# EAGLE board 16ch_hiroseadapter (EAGLE 7.2.0)
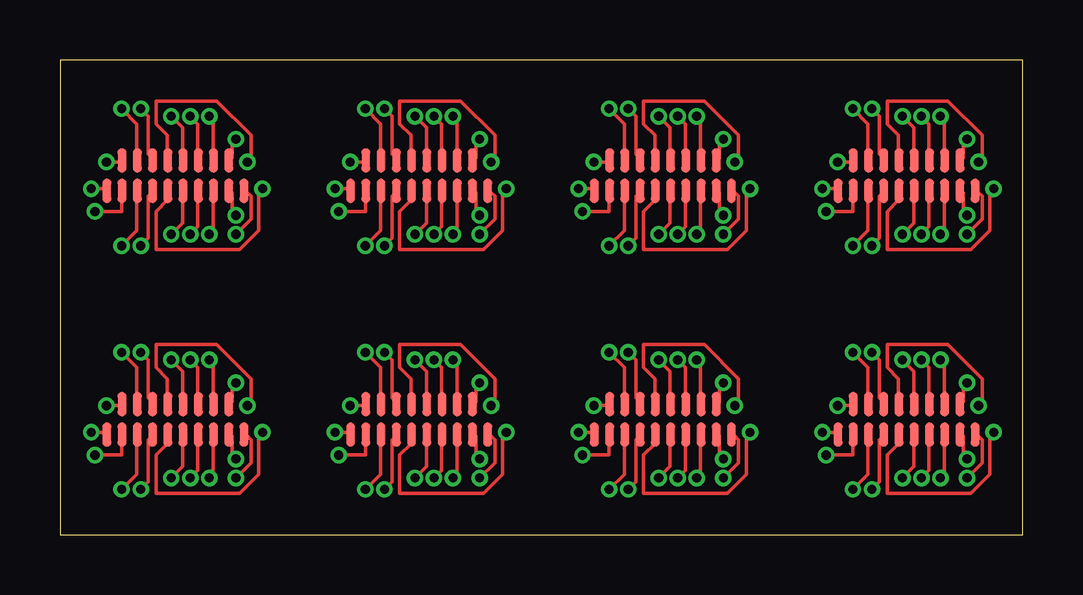
[diagram p0: board, top side]
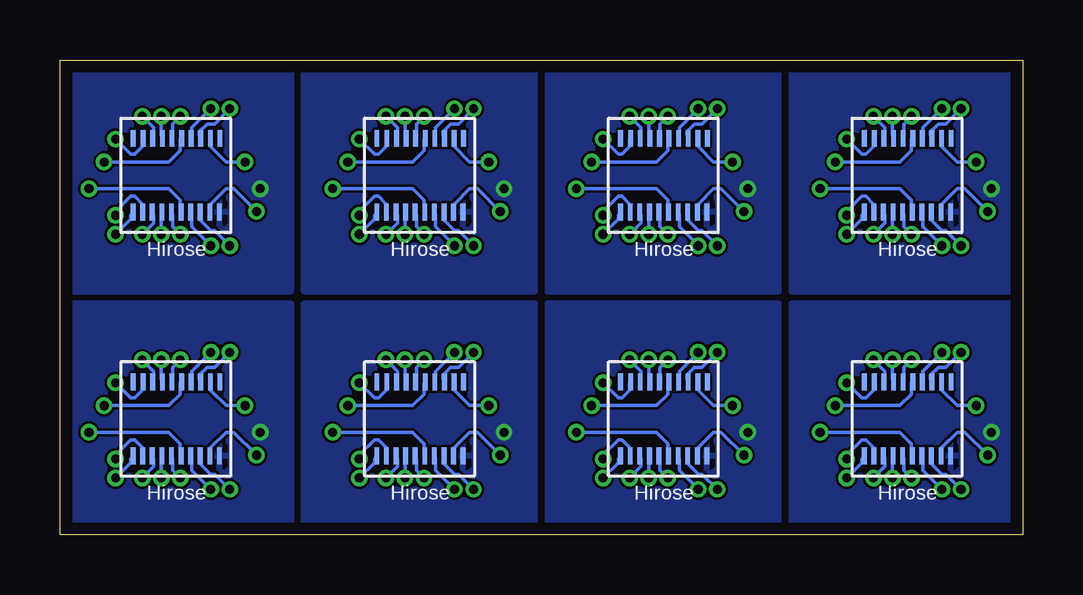
[diagram p1: board, bottom side, seen from below]

Size 40.13 x 19.81 mm. Coordinates in mm from the lower left corner, seen from the top.
Outline: 10.16,0 19.81,0
Outline: 20.32,0 29.97,0
Outline: 0,0 9.65,0 30.48,0 40.13,0 40.13,19.81 0,19.81 0,0
Copper layers (1*16): Top 0.035mm / dielectric 1.5mm / Bottom 0.035mm
Design rules "default *": minimum track width 6mil, minimum drill 15mil, track to track 4mil, track to pad 4mil, pad to pad 4mil, via to via 4mil, smd to smd 4mil, copper to edge 20mil, drill to drill 6mil, minimum pad ring 8mil, minimum via ring 6mil, stop-mask expansion 4mil, vias tented up to drill 0mil, thermal gap 10mil

## Footprints (pad centres in the part's own frame; a part is rotated, then mirrored left to right if it is on the bottom)
HIROSE_DF40C-70DS = smd 0.2 x 0.7: P$1 0,0; P$2 -0.4,0; P$3 -0.8,0; P$4 -1.2,0; P$5 -1.6,0; P$6 -2,0; P$7 -2.4,0; P$8 -2.8,0; P$9 -3.2,0; P$10 -3.6,0; P$36 0,-3.08; P$37 -0.42,-3.08; P$38 -0.82,-3.08; P$39 -1.22,-3.08; P$40 -1.62,-3.08; P$41 -2.02,-3.08; P$42 -2.42,-3.08; P$43 -2.82,-3.08; P$44 -3.22,-3.08; P$45 -3.62,-3.08
OMNETICS_FE18 = smd 0.381 x 1.016: P$1 -1.905,0.635; P$2 -1.27,0.635; P$3 -0.635,0.635; P$4 0,0.635; P$5 0.635,0.635; P$6 1.27,0.635; P$7 1.905,0.635; P$8 2.54,0.635; P$9 2.54,-0.635; P$10 1.905,-0.635; P$11 1.27,-0.635; P$12 0.635,-0.635; P$13 0,-0.635; P$14 -0.635,-0.635; P$15 -1.27,-0.635; P$16 -1.905,-0.635; P$17 -2.54,0.635; P$18 3.175,0.635

## Placement (x,y rotation side)
U$1  HIROSE_DF40_70PIN  [HIROSE_DF40C-70DS]  6.6,13.46 180 bottom
U$2  OMNETICS_FE18  [OMNETICS_FE18]  5.13,14.99 180 top
U$3  HIROSE_DF40_70PIN  [HIROSE_DF40C-70DS]  6.6,3.3 180 bottom
U$4  OMNETICS_FE18  [OMNETICS_FE18]  5.13,4.83 180 top
U$5  HIROSE_DF40_70PIN  [HIROSE_DF40C-70DS]  16.76,13.46 180 bottom
U$6  OMNETICS_FE18  [OMNETICS_FE18]  15.29,14.99 180 top
U$7  HIROSE_DF40_70PIN  [HIROSE_DF40C-70DS]  16.76,3.3 180 bottom
U$8  OMNETICS_FE18  [OMNETICS_FE18]  15.29,4.83 180 top
U$9  HIROSE_DF40_70PIN  [HIROSE_DF40C-70DS]  26.92,13.46 180 bottom
U$10  OMNETICS_FE18  [OMNETICS_FE18]  25.45,14.99 180 top
U$11  HIROSE_DF40_70PIN  [HIROSE_DF40C-70DS]  26.92,3.3 180 bottom
U$12  OMNETICS_FE18  [OMNETICS_FE18]  25.45,4.83 180 top
U$13  HIROSE_DF40_70PIN  [HIROSE_DF40C-70DS]  37.08,13.46 180 bottom
U$14  OMNETICS_FE18  [OMNETICS_FE18]  35.61,14.99 180 top
U$15  HIROSE_DF40_70PIN  [HIROSE_DF40C-70DS]  37.08,3.3 180 bottom
U$16  OMNETICS_FE18  [OMNETICS_FE18]  35.61,4.83 180 top

## Library data of the parts
U$1 U$3 U$5 U$7 U$9 U$11 U$13 U$15 = GG_hirose20
U$2 U$4 U$6 U$8 U$10 U$12 U$14 U$16 = connectors

## Nets
N$1: U$1.P$10 U$2.P$18
N$2: U$1.P$9 U$2.P$8
N$3: U$1.P$8 U$2.P$7
N$4: U$1.P$7 U$2.P$6
N$5: U$1.P$6 U$2.P$5
N$6: U$1.P$5 U$2.P$4
N$7: U$1.P$4 U$2.P$3
N$8: U$1.P$3 U$2.P$2
N$9: U$1.P$2 U$2.P$1
N$10: U$1.P$1 U$2.P$17
N$11: U$1.P$44 U$2.P$9
N$12: U$1.P$43 U$2.P$10
N$13: U$1.P$42 U$2.P$11
N$14: U$1.P$41 U$2.P$12
N$15: U$1.P$40 U$2.P$13
N$16: U$1.P$39 U$2.P$14
N$17: U$1.P$38 U$2.P$15
N$18: U$1.P$37 U$2.P$16
N$19: U$3.P$10 U$4.P$18
N$20: U$3.P$9 U$4.P$8
N$21: U$3.P$8 U$4.P$7
N$22: U$3.P$7 U$4.P$6
N$23: U$3.P$6 U$4.P$5
N$24: U$3.P$5 U$4.P$4
N$25: U$3.P$4 U$4.P$3
N$26: U$3.P$3 U$4.P$2
N$27: U$3.P$2 U$4.P$1
N$28: U$3.P$1 U$4.P$17
N$29: U$3.P$44 U$4.P$9
N$30: U$3.P$43 U$4.P$10
N$31: U$3.P$42 U$4.P$11
N$32: U$3.P$41 U$4.P$12
N$33: U$3.P$40 U$4.P$13
N$34: U$3.P$39 U$4.P$14
N$35: U$3.P$38 U$4.P$15
N$36: U$3.P$37 U$4.P$16
N$37: U$5.P$10 U$6.P$18
N$38: U$5.P$9 U$6.P$8
N$39: U$5.P$8 U$6.P$7
N$40: U$5.P$7 U$6.P$6
N$41: U$5.P$6 U$6.P$5
N$42: U$5.P$5 U$6.P$4
N$43: U$5.P$4 U$6.P$3
N$44: U$5.P$3 U$6.P$2
N$45: U$5.P$2 U$6.P$1
N$46: U$5.P$1 U$6.P$17
N$47: U$5.P$44 U$6.P$9
N$48: U$5.P$43 U$6.P$10
N$49: U$5.P$42 U$6.P$11
N$50: U$5.P$41 U$6.P$12
N$51: U$5.P$40 U$6.P$13
N$52: U$5.P$39 U$6.P$14
N$53: U$5.P$38 U$6.P$15
N$54: U$5.P$37 U$6.P$16
N$55: U$7.P$10 U$8.P$18
N$56: U$7.P$9 U$8.P$8
N$57: U$7.P$8 U$8.P$7
N$58: U$7.P$7 U$8.P$6
N$59: U$7.P$6 U$8.P$5
N$60: U$7.P$5 U$8.P$4
N$61: U$7.P$4 U$8.P$3
N$62: U$7.P$3 U$8.P$2
N$63: U$7.P$2 U$8.P$1
N$64: U$7.P$1 U$8.P$17
N$65: U$7.P$44 U$8.P$9
N$66: U$7.P$43 U$8.P$10
N$67: U$7.P$42 U$8.P$11
N$68: U$7.P$41 U$8.P$12
N$69: U$7.P$40 U$8.P$13
N$70: U$7.P$39 U$8.P$14
N$71: U$7.P$38 U$8.P$15
N$72: U$7.P$37 U$8.P$16
N$73: U$9.P$10 U$10.P$18
N$74: U$9.P$9 U$10.P$8
N$75: U$9.P$8 U$10.P$7
N$76: U$9.P$7 U$10.P$6
N$77: U$9.P$6 U$10.P$5
N$78: U$9.P$5 U$10.P$4
N$79: U$9.P$4 U$10.P$3
N$80: U$9.P$3 U$10.P$2
N$81: U$9.P$2 U$10.P$1
N$82: U$9.P$1 U$10.P$17
N$83: U$9.P$44 U$10.P$9
N$84: U$9.P$43 U$10.P$10
N$85: U$9.P$42 U$10.P$11
N$86: U$9.P$41 U$10.P$12
N$87: U$9.P$40 U$10.P$13
N$88: U$9.P$39 U$10.P$14
N$89: U$9.P$38 U$10.P$15
N$90: U$9.P$37 U$10.P$16
N$91: U$11.P$10 U$12.P$18
N$92: U$11.P$9 U$12.P$8
N$93: U$11.P$8 U$12.P$7
N$94: U$11.P$7 U$12.P$6
N$95: U$11.P$6 U$12.P$5
N$96: U$11.P$5 U$12.P$4
N$97: U$11.P$4 U$12.P$3
N$98: U$11.P$3 U$12.P$2
N$99: U$11.P$2 U$12.P$1
N$100: U$11.P$1 U$12.P$17
N$101: U$11.P$44 U$12.P$9
N$102: U$11.P$43 U$12.P$10
N$103: U$11.P$42 U$12.P$11
N$104: U$11.P$41 U$12.P$12
N$105: U$11.P$40 U$12.P$13
N$106: U$11.P$39 U$12.P$14
N$107: U$11.P$38 U$12.P$15
N$108: U$11.P$37 U$12.P$16
N$109: U$13.P$10 U$14.P$18
N$110: U$13.P$9 U$14.P$8
N$111: U$13.P$8 U$14.P$7
N$112: U$13.P$7 U$14.P$6
N$113: U$13.P$6 U$14.P$5
N$114: U$13.P$5 U$14.P$4
N$115: U$13.P$4 U$14.P$3
N$116: U$13.P$3 U$14.P$2
N$117: U$13.P$2 U$14.P$1
N$118: U$13.P$1 U$14.P$17
N$119: U$13.P$44 U$14.P$9
N$120: U$13.P$43 U$14.P$10
N$121: U$13.P$42 U$14.P$11
N$122: U$13.P$41 U$14.P$12
N$123: U$13.P$40 U$14.P$13
N$124: U$13.P$39 U$14.P$14
N$125: U$13.P$38 U$14.P$15
N$126: U$13.P$37 U$14.P$16
N$127: U$15.P$10 U$16.P$18
N$128: U$15.P$9 U$16.P$8
N$129: U$15.P$8 U$16.P$7
N$130: U$15.P$7 U$16.P$6
N$131: U$15.P$6 U$16.P$5
N$132: U$15.P$5 U$16.P$4
N$133: U$15.P$4 U$16.P$3
N$134: U$15.P$3 U$16.P$2
N$135: U$15.P$2 U$16.P$1
N$136: U$15.P$1 U$16.P$17
N$137: U$15.P$44 U$16.P$9
N$138: U$15.P$43 U$16.P$10
N$139: U$15.P$42 U$16.P$11
N$140: U$15.P$41 U$16.P$12
N$141: U$15.P$40 U$16.P$13
N$142: U$15.P$39 U$16.P$14
N$143: U$15.P$38 U$16.P$15
N$144: U$15.P$37 U$16.P$16

## Tracks (layer width: path | path; a pad name or v marks a point on that pad's centre or on a via)
N$1  (via drill 0.38)
  Top 0.152: v1.3,14.45 1.94,14.45 U$2.P$18
  pour Bottom: 0,19.81 9.65,19.81 9.65,10.16 0,10.16
N$2  (via drill 0.38)
  Top 0.152: v1.46,13.49 2.57,13.49 2.57,14.29 U$2.P$8
  Bottom 0.152: v1.46,13.49 2.41,14.45 2.73,14.45 3.37,13.81 3.37,13.49 U$1.P$9
N$3  (via drill 0.38)
  Top 0.152: v2.57,12.06 3.21,12.7 3.21,14.29 U$2.P$7
  Bottom 0.152: v2.57,12.06 3.21,12.7 3.37,12.7 3.84,13.18 3.84,13.34 U$1.P$8
N$4  (via drill 0.38)
  Top 0.152: v3.37,12.06 3.68,12.38 3.68,14.13 3.84,14.29 U$2.P$6
  Bottom 0.152: v3.37,12.06 4.16,12.86 4.16,13.34 U$1.P$7
N$5  (via drill 0.38)
  Top 0.152: v8.45,14.45 8.29,14.29 8.29,12.7 7.49,11.91 4,11.91 4,13.49 4.48,13.97 4.48,14.29 U$2.P$5
  Bottom 0.152: v8.45,14.45 5.11,14.45 4.64,13.97 4.64,13.49 U$1.P$6
N$6  (via drill 0.38)
  Top 0.152: v4.64,12.54 5.11,13.02 5.11,14.29 U$2.P$4
  Bottom 0.152: v4.64,12.54 4.95,12.86 4.95,13.34 U$1.P$5
N$7  (via drill 0.38)
  Top 0.152: v5.43,12.54 5.75,12.86 5.75,14.29 U$2.P$3
  Bottom 0.152: v5.43,12.54 5.43,13.34 U$1.P$4
N$8  (via drill 0.38)
  Top 0.152: v6.22,12.54 6.38,12.7 6.38,14.29 U$2.P$2
  Bottom 0.152: v6.22,12.54 5.75,13.02 5.75,13.34 U$1.P$3
N$9  (via drill 0.38)
  Top 0.152: v7.33,13.34 7.18,13.49 7.18,14.29 U$2.P$1
  Bottom 0.152: v7.33,13.34 7.33,13.49 6.7,14.13 6.54,14.13 6.22,13.81 6.22,13.49 U$1.P$2
N$10  (via drill 0.38)
  Top 0.152: v7.33,12.54 7.97,13.18 7.97,14.13 7.81,14.29 U$2.P$17
  Bottom 0.152: v7.33,12.54 6.7,13.18 6.7,13.34 U$1.P$1
N$11  (via drill 0.38)
  Top 0.152: v1.94,15.56 2.57,15.56 U$2.P$9
  Bottom 0.152: v1.94,15.56 2.73,15.56 3.37,16.19 3.37,16.51 U$1.P$44
N$12  (via drill 0.38)
  Top 0.152: v2.57,17.78 3.21,17.15 3.21,15.72 U$2.P$10
  Bottom 0.152: v2.57,17.78 3.21,17.15 3.52,17.15 3.84,16.83 3.84,16.67 U$1.P$43
N$13  (via drill 0.38)
  Top 0.152: v3.37,17.78 3.68,17.46 3.68,15.88 3.84,15.72 U$2.P$11
  Bottom 0.152: v3.37,17.78 4.16,16.99 4.16,16.67 U$1.P$42
N$14  (via drill 0.38)
  Top 0.152: v7.81,15.56 7.97,15.72 7.97,16.67 6.54,18.1 4,18.1 4,17.15 4.48,16.67 4.48,15.72 U$2.P$12
  Bottom 0.152: v7.81,15.56 5.11,15.56 4.64,16.03 4.64,16.51 U$1.P$41
N$15  (via drill 0.38)
  Top 0.152: v4.64,17.46 5.11,16.99 5.11,15.72 U$2.P$13
  Bottom 0.152: v4.64,17.46 4.95,17.15 4.95,16.67 U$1.P$40
N$16  (via drill 0.38)
  Top 0.152: v5.43,17.46 5.75,17.15 5.75,15.72 U$2.P$14
  Bottom 0.152: v5.43,17.46 5.43,16.67 U$1.P$39
N$17  (via drill 0.38)
  Top 0.152: v6.22,17.46 6.38,17.3 6.38,15.72 U$2.P$15
  Bottom 0.152: v6.22,17.46 5.75,16.99 5.75,16.67 U$1.P$38
N$18  (via drill 0.38)
  Top 0.152: v7.33,16.51 7.18,16.35 7.18,15.72 U$2.P$16
  Bottom 0.152: v7.33,16.51 6.7,15.88 6.54,15.88 6.22,16.19 6.22,16.51 U$1.P$37
N$19  (via drill 0.38)
  Top 0.152: v1.3,4.29 1.94,4.29 U$4.P$18
  pour Bottom: 0,9.65 9.65,9.65 9.65,0 0,0
N$20  (via drill 0.38)
  Top 0.152: v1.46,3.33 2.57,3.33 2.57,4.13 U$4.P$8
  Bottom 0.152: v1.46,3.33 2.41,4.29 2.73,4.29 3.37,3.65 3.37,3.33 U$3.P$9
N$21  (via drill 0.38)
  Top 0.152: v2.57,1.91 3.21,2.54 3.21,4.13 U$4.P$7
  Bottom 0.152: v2.57,1.91 3.21,2.54 3.37,2.54 3.84,3.02 3.84,3.18 U$3.P$8
N$22  (via drill 0.38)
  Top 0.152: v3.37,1.91 3.68,2.22 3.68,3.97 3.84,4.13 U$4.P$6
  Bottom 0.152: v3.37,1.91 4.16,2.7 4.16,3.18 U$3.P$7
N$23  (via drill 0.38)
  Top 0.152: v8.45,4.29 8.29,4.13 8.29,2.54 7.49,1.75 4,1.75 4,3.33 4.48,3.81 4.48,4.13 U$4.P$5
  Bottom 0.152: v8.45,4.29 5.11,4.29 4.64,3.81 4.64,3.33 U$3.P$6
N$24  (via drill 0.38)
  Top 0.152: v4.64,2.38 5.11,2.86 5.11,4.13 U$4.P$4
  Bottom 0.152: v4.64,2.38 4.95,2.7 4.95,3.18 U$3.P$5
N$25  (via drill 0.38)
  Top 0.152: v5.43,2.38 5.75,2.7 5.75,4.13 U$4.P$3
  Bottom 0.152: v5.43,2.38 5.43,3.18 U$3.P$4
N$26  (via drill 0.38)
  Top 0.152: v6.22,2.38 6.38,2.54 6.38,4.13 U$4.P$2
  Bottom 0.152: v6.22,2.38 5.75,2.86 5.75,3.18 U$3.P$3
N$27  (via drill 0.38)
  Top 0.152: v7.33,3.18 7.18,3.33 7.18,4.13 U$4.P$1
  Bottom 0.152: v7.33,3.18 7.33,3.33 6.7,3.97 6.54,3.97 6.22,3.65 6.22,3.33 U$3.P$2
N$28  (via drill 0.38)
  Top 0.152: v7.33,2.38 7.97,3.02 7.97,3.97 7.81,4.13 U$4.P$17
  Bottom 0.152: v7.33,2.38 6.7,3.02 6.7,3.18 U$3.P$1
N$29  (via drill 0.38)
  Top 0.152: v1.94,5.4 2.57,5.4 U$4.P$9
  Bottom 0.152: v1.94,5.4 2.73,5.4 3.37,6.03 3.37,6.35 U$3.P$44
N$30  (via drill 0.38)
  Top 0.152: v2.57,7.62 3.21,6.98 3.21,5.56 U$4.P$10
  Bottom 0.152: v2.57,7.62 3.21,6.98 3.52,6.98 3.84,6.67 3.84,6.51 U$3.P$43
N$31  (via drill 0.38)
  Top 0.152: v3.37,7.62 3.68,7.3 3.68,5.71 3.84,5.56 U$4.P$11
  Bottom 0.152: v3.37,7.62 4.16,6.83 4.16,6.51 U$3.P$42
N$32  (via drill 0.38)
  Top 0.152: v7.81,5.4 7.97,5.56 7.97,6.51 6.54,7.94 4,7.94 4,6.98 4.48,6.51 4.48,5.56 U$4.P$12
  Bottom 0.152: v7.81,5.4 5.11,5.4 4.64,5.87 4.64,6.35 U$3.P$41
N$33  (via drill 0.38)
  Top 0.152: v4.64,7.3 5.11,6.83 5.11,5.56 U$4.P$13
  Bottom 0.152: v4.64,7.3 4.95,6.98 4.95,6.51 U$3.P$40
N$34  (via drill 0.38)
  Top 0.152: v5.43,7.3 5.75,6.98 5.75,5.56 U$4.P$14
  Bottom 0.152: v5.43,7.3 5.43,6.51 U$3.P$39
N$35  (via drill 0.38)
  Top 0.152: v6.22,7.3 6.38,7.14 6.38,5.56 U$4.P$15
  Bottom 0.152: v6.22,7.3 5.75,6.83 5.75,6.51 U$3.P$38
N$36  (via drill 0.38)
  Top 0.152: v7.33,6.35 7.18,6.19 7.18,5.56 U$4.P$16
  Bottom 0.152: v7.33,6.35 6.7,5.71 6.54,5.71 6.22,6.03 6.22,6.35 U$3.P$37
N$37  (via drill 0.38)
  Top 0.152: v11.46,14.45 12.1,14.45 U$6.P$18
  pour Bottom: 10.16,19.81 19.81,19.81 19.81,10.16 10.16,10.16
N$38  (via drill 0.38)
  Top 0.152: v11.62,13.49 12.73,13.49 12.73,14.29 U$6.P$8
  Bottom 0.152: v11.62,13.49 12.57,14.45 12.89,14.45 13.53,13.81 13.53,13.49 U$5.P$9
N$39  (via drill 0.38)
  Top 0.152: v12.73,12.06 13.37,12.7 13.37,14.29 U$6.P$7
  Bottom 0.152: v12.73,12.06 13.37,12.7 13.53,12.7 14,13.18 14,13.34 U$5.P$8
N$40  (via drill 0.38)
  Top 0.152: v13.53,12.06 13.84,12.38 13.84,14.13 14,14.29 U$6.P$6
  Bottom 0.152: v13.53,12.06 14.32,12.86 14.32,13.34 U$5.P$7
N$41  (via drill 0.38)
  Top 0.152: v18.61,14.45 18.45,14.29 18.45,12.7 17.65,11.91 14.16,11.91 14.16,13.49 14.64,13.97 14.64,14.29 U$6.P$5
  Bottom 0.152: v18.61,14.45 15.27,14.45 14.8,13.97 14.8,13.49 U$5.P$6
N$42  (via drill 0.38)
  Top 0.152: v14.8,12.54 15.27,13.02 15.27,14.29 U$6.P$4
  Bottom 0.152: v14.8,12.54 15.11,12.86 15.11,13.34 U$5.P$5
N$43  (via drill 0.38)
  Top 0.152: v15.59,12.54 15.91,12.86 15.91,14.29 U$6.P$3
  Bottom 0.152: v15.59,12.54 15.59,13.34 U$5.P$4
N$44  (via drill 0.38)
  Top 0.152: v16.38,12.54 16.54,12.7 16.54,14.29 U$6.P$2
  Bottom 0.152: v16.38,12.54 15.91,13.02 15.91,13.34 U$5.P$3
N$45  (via drill 0.38)
  Top 0.152: v17.49,13.34 17.34,13.49 17.34,14.29 U$6.P$1
  Bottom 0.152: v17.49,13.34 17.49,13.49 16.86,14.13 16.7,14.13 16.38,13.81 16.38,13.49 U$5.P$2
N$46  (via drill 0.38)
  Top 0.152: v17.49,12.54 18.13,13.18 18.13,14.13 17.97,14.29 U$6.P$17
  Bottom 0.152: v17.49,12.54 16.86,13.18 16.86,13.34 U$5.P$1
N$47  (via drill 0.38)
  Top 0.152: v12.1,15.56 12.73,15.56 U$6.P$9
  Bottom 0.152: v12.1,15.56 12.89,15.56 13.53,16.19 13.53,16.51 U$5.P$44
N$48  (via drill 0.38)
  Top 0.152: v12.73,17.78 13.37,17.15 13.37,15.72 U$6.P$10
  Bottom 0.152: v12.73,17.78 13.37,17.15 13.68,17.15 14,16.83 14,16.67 U$5.P$43
N$49  (via drill 0.38)
  Top 0.152: v13.53,17.78 13.84,17.46 13.84,15.88 14,15.72 U$6.P$11
  Bottom 0.152: v13.53,17.78 14.32,16.99 14.32,16.67 U$5.P$42
N$50  (via drill 0.38)
  Top 0.152: v17.97,15.56 18.13,15.72 18.13,16.67 16.7,18.1 14.16,18.1 14.16,17.15 14.64,16.67 14.64,15.72 U$6.P$12
  Bottom 0.152: v17.97,15.56 15.27,15.56 14.8,16.03 14.8,16.51 U$5.P$41
N$51  (via drill 0.38)
  Top 0.152: v14.8,17.46 15.27,16.99 15.27,15.72 U$6.P$13
  Bottom 0.152: v14.8,17.46 15.11,17.15 15.11,16.67 U$5.P$40
N$52  (via drill 0.38)
  Top 0.152: v15.59,17.46 15.91,17.15 15.91,15.72 U$6.P$14
  Bottom 0.152: v15.59,17.46 15.59,16.67 U$5.P$39
N$53  (via drill 0.38)
  Top 0.152: v16.38,17.46 16.54,17.3 16.54,15.72 U$6.P$15
  Bottom 0.152: v16.38,17.46 15.91,16.99 15.91,16.67 U$5.P$38
N$54  (via drill 0.38)
  Top 0.152: v17.49,16.51 17.34,16.35 17.34,15.72 U$6.P$16
  Bottom 0.152: v17.49,16.51 16.86,15.88 16.7,15.88 16.38,16.19 16.38,16.51 U$5.P$37
N$55  (via drill 0.38)
  Top 0.152: v11.46,4.29 12.1,4.29 U$8.P$18
  pour Bottom: 10.16,9.65 19.81,9.65 19.81,0 10.16,0
N$56  (via drill 0.38)
  Top 0.152: v11.62,3.33 12.73,3.33 12.73,4.13 U$8.P$8
  Bottom 0.152: v11.62,3.33 12.57,4.29 12.89,4.29 13.53,3.65 13.53,3.33 U$7.P$9
N$57  (via drill 0.38)
  Top 0.152: v12.73,1.91 13.37,2.54 13.37,4.13 U$8.P$7
  Bottom 0.152: v12.73,1.91 13.37,2.54 13.53,2.54 14,3.02 14,3.18 U$7.P$8
N$58  (via drill 0.38)
  Top 0.152: v13.53,1.91 13.84,2.22 13.84,3.97 14,4.13 U$8.P$6
  Bottom 0.152: v13.53,1.91 14.32,2.7 14.32,3.18 U$7.P$7
N$59  (via drill 0.38)
  Top 0.152: v18.61,4.29 18.45,4.13 18.45,2.54 17.65,1.75 14.16,1.75 14.16,3.33 14.64,3.81 14.64,4.13 U$8.P$5
  Bottom 0.152: v18.61,4.29 15.27,4.29 14.8,3.81 14.8,3.33 U$7.P$6
N$60  (via drill 0.38)
  Top 0.152: v14.8,2.38 15.27,2.86 15.27,4.13 U$8.P$4
  Bottom 0.152: v14.8,2.38 15.11,2.7 15.11,3.18 U$7.P$5
N$61  (via drill 0.38)
  Top 0.152: v15.59,2.38 15.91,2.7 15.91,4.13 U$8.P$3
  Bottom 0.152: v15.59,2.38 15.59,3.18 U$7.P$4
N$62  (via drill 0.38)
  Top 0.152: v16.38,2.38 16.54,2.54 16.54,4.13 U$8.P$2
  Bottom 0.152: v16.38,2.38 15.91,2.86 15.91,3.18 U$7.P$3
N$63  (via drill 0.38)
  Top 0.152: v17.49,3.18 17.34,3.33 17.34,4.13 U$8.P$1
  Bottom 0.152: v17.49,3.18 17.49,3.33 16.86,3.97 16.7,3.97 16.38,3.65 16.38,3.33 U$7.P$2
N$64  (via drill 0.38)
  Top 0.152: v17.49,2.38 18.13,3.02 18.13,3.97 17.97,4.13 U$8.P$17
  Bottom 0.152: v17.49,2.38 16.86,3.02 16.86,3.18 U$7.P$1
N$65  (via drill 0.38)
  Top 0.152: v12.1,5.4 12.73,5.4 U$8.P$9
  Bottom 0.152: v12.1,5.4 12.89,5.4 13.53,6.03 13.53,6.35 U$7.P$44
N$66  (via drill 0.38)
  Top 0.152: v12.73,7.62 13.37,6.98 13.37,5.56 U$8.P$10
  Bottom 0.152: v12.73,7.62 13.37,6.98 13.68,6.98 14,6.67 14,6.51 U$7.P$43
N$67  (via drill 0.38)
  Top 0.152: v13.53,7.62 13.84,7.3 13.84,5.71 14,5.56 U$8.P$11
  Bottom 0.152: v13.53,7.62 14.32,6.83 14.32,6.51 U$7.P$42
N$68  (via drill 0.38)
  Top 0.152: v17.97,5.4 18.13,5.56 18.13,6.51 16.7,7.94 14.16,7.94 14.16,6.98 14.64,6.51 14.64,5.56 U$8.P$12
  Bottom 0.152: v17.97,5.4 15.27,5.4 14.8,5.87 14.8,6.35 U$7.P$41
N$69  (via drill 0.38)
  Top 0.152: v14.8,7.3 15.27,6.83 15.27,5.56 U$8.P$13
  Bottom 0.152: v14.8,7.3 15.11,6.98 15.11,6.51 U$7.P$40
N$70  (via drill 0.38)
  Top 0.152: v15.59,7.3 15.91,6.98 15.91,5.56 U$8.P$14
  Bottom 0.152: v15.59,7.3 15.59,6.51 U$7.P$39
N$71  (via drill 0.38)
  Top 0.152: v16.38,7.3 16.54,7.14 16.54,5.56 U$8.P$15
  Bottom 0.152: v16.38,7.3 15.91,6.83 15.91,6.51 U$7.P$38
N$72  (via drill 0.38)
  Top 0.152: v17.49,6.35 17.34,6.19 17.34,5.56 U$8.P$16
  Bottom 0.152: v17.49,6.35 16.86,5.71 16.7,5.71 16.38,6.03 16.38,6.35 U$7.P$37
N$73  (via drill 0.38)
  Top 0.152: v21.62,14.45 22.26,14.45 U$10.P$18
  pour Bottom: 20.32,19.81 29.97,19.81 29.97,10.16 20.32,10.16
N$74  (via drill 0.38)
  Top 0.152: v21.78,13.49 22.89,13.49 22.89,14.29 U$10.P$8
  Bottom 0.152: v21.78,13.49 22.73,14.45 23.05,14.45 23.69,13.81 23.69,13.49 U$9.P$9
N$75  (via drill 0.38)
  Top 0.152: v22.89,12.06 23.53,12.7 23.53,14.29 U$10.P$7
  Bottom 0.152: v22.89,12.06 23.53,12.7 23.69,12.7 24.16,13.18 24.16,13.34 U$9.P$8
N$76  (via drill 0.38)
  Top 0.152: v23.69,12.06 24,12.38 24,14.13 24.16,14.29 U$10.P$6
  Bottom 0.152: v23.69,12.06 24.48,12.86 24.48,13.34 U$9.P$7
N$77  (via drill 0.38)
  Top 0.152: v28.76,14.45 28.61,14.29 28.61,12.7 27.81,11.91 24.32,11.91 24.32,13.49 24.8,13.97 24.8,14.29 U$10.P$5
  Bottom 0.152: v28.76,14.45 25.43,14.45 24.95,13.97 24.95,13.49 U$9.P$6
N$78  (via drill 0.38)
  Top 0.152: v24.95,12.54 25.43,13.02 25.43,14.29 U$10.P$4
  Bottom 0.152: v24.95,12.54 25.27,12.86 25.27,13.34 U$9.P$5
N$79  (via drill 0.38)
  Top 0.152: v25.75,12.54 26.07,12.86 26.07,14.29 U$10.P$3
  Bottom 0.152: v25.75,12.54 25.75,13.34 U$9.P$4
N$80  (via drill 0.38)
  Top 0.152: v26.54,12.54 26.7,12.7 26.7,14.29 U$10.P$2
  Bottom 0.152: v26.54,12.54 26.07,13.02 26.07,13.34 U$9.P$3
N$81  (via drill 0.38)
  Top 0.152: v27.65,13.34 27.5,13.49 27.5,14.29 U$10.P$1
  Bottom 0.152: v27.65,13.34 27.65,13.49 27.02,14.13 26.86,14.13 26.54,13.81 26.54,13.49 U$9.P$2
N$82  (via drill 0.38)
  Top 0.152: v27.65,12.54 28.29,13.18 28.29,14.13 28.13,14.29 U$10.P$17
  Bottom 0.152: v27.65,12.54 27.02,13.18 27.02,13.34 U$9.P$1
N$83  (via drill 0.38)
  Top 0.152: v22.26,15.56 22.89,15.56 U$10.P$9
  Bottom 0.152: v22.26,15.56 23.05,15.56 23.69,16.19 23.69,16.51 U$9.P$44
N$84  (via drill 0.38)
  Top 0.152: v22.89,17.78 23.53,17.15 23.53,15.72 U$10.P$10
  Bottom 0.152: v22.89,17.78 23.53,17.15 23.84,17.15 24.16,16.83 24.16,16.67 U$9.P$43
N$85  (via drill 0.38)
  Top 0.152: v23.69,17.78 24,17.46 24,15.88 24.16,15.72 U$10.P$11
  Bottom 0.152: v23.69,17.78 24.48,16.99 24.48,16.67 U$9.P$42
N$86  (via drill 0.38)
  Top 0.152: v28.13,15.56 28.29,15.72 28.29,16.67 26.86,18.1 24.32,18.1 24.32,17.15 24.8,16.67 24.8,15.72 U$10.P$12
  Bottom 0.152: v28.13,15.56 25.43,15.56 24.95,16.03 24.95,16.51 U$9.P$41
N$87  (via drill 0.38)
  Top 0.152: v24.95,17.46 25.43,16.99 25.43,15.72 U$10.P$13
  Bottom 0.152: v24.95,17.46 25.27,17.15 25.27,16.67 U$9.P$40
N$88  (via drill 0.38)
  Top 0.152: v25.75,17.46 26.07,17.15 26.07,15.72 U$10.P$14
  Bottom 0.152: v25.75,17.46 25.75,16.67 U$9.P$39
N$89  (via drill 0.38)
  Top 0.152: v26.54,17.46 26.7,17.3 26.7,15.72 U$10.P$15
  Bottom 0.152: v26.54,17.46 26.07,16.99 26.07,16.67 U$9.P$38
N$90  (via drill 0.38)
  Top 0.152: v27.65,16.51 27.5,16.35 27.5,15.72 U$10.P$16
  Bottom 0.152: v27.65,16.51 27.02,15.88 26.86,15.88 26.54,16.19 26.54,16.51 U$9.P$37
N$91  (via drill 0.38)
  Top 0.152: v21.62,4.29 22.26,4.29 U$12.P$18
  pour Bottom: 20.32,9.65 29.97,9.65 29.97,0 20.32,0
N$92  (via drill 0.38)
  Top 0.152: v21.78,3.33 22.89,3.33 22.89,4.13 U$12.P$8
  Bottom 0.152: v21.78,3.33 22.73,4.29 23.05,4.29 23.69,3.65 23.69,3.33 U$11.P$9
N$93  (via drill 0.38)
  Top 0.152: v22.89,1.91 23.53,2.54 23.53,4.13 U$12.P$7
  Bottom 0.152: v22.89,1.91 23.53,2.54 23.69,2.54 24.16,3.02 24.16,3.18 U$11.P$8
N$94  (via drill 0.38)
  Top 0.152: v23.69,1.91 24,2.22 24,3.97 24.16,4.13 U$12.P$6
  Bottom 0.152: v23.69,1.91 24.48,2.7 24.48,3.18 U$11.P$7
N$95  (via drill 0.38)
  Top 0.152: v28.76,4.29 28.61,4.13 28.61,2.54 27.81,1.75 24.32,1.75 24.32,3.33 24.8,3.81 24.8,4.13 U$12.P$5
  Bottom 0.152: v28.76,4.29 25.43,4.29 24.95,3.81 24.95,3.33 U$11.P$6
N$96  (via drill 0.38)
  Top 0.152: v24.95,2.38 25.43,2.86 25.43,4.13 U$12.P$4
  Bottom 0.152: v24.95,2.38 25.27,2.7 25.27,3.18 U$11.P$5
N$97  (via drill 0.38)
  Top 0.152: v25.75,2.38 26.07,2.7 26.07,4.13 U$12.P$3
  Bottom 0.152: v25.75,2.38 25.75,3.18 U$11.P$4
N$98  (via drill 0.38)
  Top 0.152: v26.54,2.38 26.7,2.54 26.7,4.13 U$12.P$2
  Bottom 0.152: v26.54,2.38 26.07,2.86 26.07,3.18 U$11.P$3
N$99  (via drill 0.38)
  Top 0.152: v27.65,3.18 27.5,3.33 27.5,4.13 U$12.P$1
  Bottom 0.152: v27.65,3.18 27.65,3.33 27.02,3.97 26.86,3.97 26.54,3.65 26.54,3.33 U$11.P$2
N$100  (via drill 0.38)
  Top 0.152: v27.65,2.38 28.29,3.02 28.29,3.97 28.13,4.13 U$12.P$17
  Bottom 0.152: v27.65,2.38 27.02,3.02 27.02,3.18 U$11.P$1
N$101  (via drill 0.38)
  Top 0.152: v22.26,5.4 22.89,5.4 U$12.P$9
  Bottom 0.152: v22.26,5.4 23.05,5.4 23.69,6.03 23.69,6.35 U$11.P$44
N$102  (via drill 0.38)
  Top 0.152: v22.89,7.62 23.53,6.98 23.53,5.56 U$12.P$10
  Bottom 0.152: v22.89,7.62 23.53,6.98 23.84,6.98 24.16,6.67 24.16,6.51 U$11.P$43
N$103  (via drill 0.38)
  Top 0.152: v23.69,7.62 24,7.3 24,5.71 24.16,5.56 U$12.P$11
  Bottom 0.152: v23.69,7.62 24.48,6.83 24.48,6.51 U$11.P$42
N$104  (via drill 0.38)
  Top 0.152: v28.13,5.4 28.29,5.56 28.29,6.51 26.86,7.94 24.32,7.94 24.32,6.98 24.8,6.51 24.8,5.56 U$12.P$12
  Bottom 0.152: v28.13,5.4 25.43,5.4 24.95,5.87 24.95,6.35 U$11.P$41
N$105  (via drill 0.38)
  Top 0.152: v24.95,7.3 25.43,6.83 25.43,5.56 U$12.P$13
  Bottom 0.152: v24.95,7.3 25.27,6.98 25.27,6.51 U$11.P$40
N$106  (via drill 0.38)
  Top 0.152: v25.75,7.3 26.07,6.98 26.07,5.56 U$12.P$14
  Bottom 0.152: v25.75,7.3 25.75,6.51 U$11.P$39
N$107  (via drill 0.38)
  Top 0.152: v26.54,7.3 26.7,7.14 26.7,5.56 U$12.P$15
  Bottom 0.152: v26.54,7.3 26.07,6.83 26.07,6.51 U$11.P$38
N$108  (via drill 0.38)
  Top 0.152: v27.65,6.35 27.5,6.19 27.5,5.56 U$12.P$16
  Bottom 0.152: v27.65,6.35 27.02,5.71 26.86,5.71 26.54,6.03 26.54,6.35 U$11.P$37
N$109  (via drill 0.38)
  Top 0.152: v31.78,14.45 32.42,14.45 U$14.P$18
  pour Bottom: 30.48,19.81 40.13,19.81 40.13,10.16 30.48,10.16
N$110  (via drill 0.38)
  Top 0.152: v31.94,13.49 33.05,13.49 33.05,14.29 U$14.P$8
  Bottom 0.152: v31.94,13.49 32.89,14.45 33.21,14.45 33.84,13.81 33.84,13.49 U$13.P$9
N$111  (via drill 0.38)
  Top 0.152: v33.05,12.06 33.69,12.7 33.69,14.29 U$14.P$7
  Bottom 0.152: v33.05,12.06 33.69,12.7 33.84,12.7 34.32,13.18 34.32,13.34 U$13.P$8
N$112  (via drill 0.38)
  Top 0.152: v33.84,12.06 34.16,12.38 34.16,14.13 34.32,14.29 U$14.P$6
  Bottom 0.152: v33.84,12.06 34.64,12.86 34.64,13.34 U$13.P$7
N$113  (via drill 0.38)
  Top 0.152: v38.92,14.45 38.77,14.29 38.77,12.7 37.97,11.91 34.48,11.91 34.48,13.49 34.96,13.97 34.96,14.29 U$14.P$5
  Bottom 0.152: v38.92,14.45 35.59,14.45 35.12,13.97 35.12,13.49 U$13.P$6
N$114  (via drill 0.38)
  Top 0.152: v35.12,12.54 35.59,13.02 35.59,14.29 U$14.P$4
  Bottom 0.152: v35.12,12.54 35.43,12.86 35.43,13.34 U$13.P$5
N$115  (via drill 0.38)
  Top 0.152: v35.91,12.54 36.23,12.86 36.23,14.29 U$14.P$3
  Bottom 0.152: v35.91,12.54 35.91,13.34 U$13.P$4
N$116  (via drill 0.38)
  Top 0.152: v36.7,12.54 36.86,12.7 36.86,14.29 U$14.P$2
  Bottom 0.152: v36.7,12.54 36.23,13.02 36.23,13.34 U$13.P$3
N$117  (via drill 0.38)
  Top 0.152: v37.81,13.34 37.65,13.49 37.65,14.29 U$14.P$1
  Bottom 0.152: v37.81,13.34 37.81,13.49 37.18,14.13 37.02,14.13 36.7,13.81 36.7,13.49 U$13.P$2
N$118  (via drill 0.38)
  Top 0.152: v37.81,12.54 38.45,13.18 38.45,14.13 38.29,14.29 U$14.P$17
  Bottom 0.152: v37.81,12.54 37.18,13.18 37.18,13.34 U$13.P$1
N$119  (via drill 0.38)
  Top 0.152: v32.42,15.56 33.05,15.56 U$14.P$9
  Bottom 0.152: v32.42,15.56 33.21,15.56 33.84,16.19 33.84,16.51 U$13.P$44
N$120  (via drill 0.38)
  Top 0.152: v33.05,17.78 33.69,17.15 33.69,15.72 U$14.P$10
  Bottom 0.152: v33.05,17.78 33.69,17.15 34,17.15 34.32,16.83 34.32,16.67 U$13.P$43
N$121  (via drill 0.38)
  Top 0.152: v33.84,17.78 34.16,17.46 34.16,15.88 34.32,15.72 U$14.P$11
  Bottom 0.152: v33.84,17.78 34.64,16.99 34.64,16.67 U$13.P$42
N$122  (via drill 0.38)
  Top 0.152: v38.29,15.56 38.45,15.72 38.45,16.67 37.02,18.1 34.48,18.1 34.48,17.15 34.96,16.67 34.96,15.72 U$14.P$12
  Bottom 0.152: v38.29,15.56 35.59,15.56 35.12,16.03 35.12,16.51 U$13.P$41
N$123  (via drill 0.38)
  Top 0.152: v35.12,17.46 35.59,16.99 35.59,15.72 U$14.P$13
  Bottom 0.152: v35.12,17.46 35.43,17.15 35.43,16.67 U$13.P$40
N$124  (via drill 0.38)
  Top 0.152: v35.91,17.46 36.23,17.15 36.23,15.72 U$14.P$14
  Bottom 0.152: v35.91,17.46 35.91,16.67 U$13.P$39
N$125  (via drill 0.38)
  Top 0.152: v36.7,17.46 36.86,17.3 36.86,15.72 U$14.P$15
  Bottom 0.152: v36.7,17.46 36.23,16.99 36.23,16.67 U$13.P$38
N$126  (via drill 0.38)
  Top 0.152: v37.81,16.51 37.65,16.35 37.65,15.72 U$14.P$16
  Bottom 0.152: v37.81,16.51 37.18,15.88 37.02,15.88 36.7,16.19 36.7,16.51 U$13.P$37
N$127  (via drill 0.38)
  Top 0.152: v31.78,4.29 32.42,4.29 U$16.P$18
  pour Bottom: 30.48,9.65 40.13,9.65 40.13,0 30.48,0
N$128  (via drill 0.38)
  Top 0.152: v31.94,3.33 33.05,3.33 33.05,4.13 U$16.P$8
  Bottom 0.152: v31.94,3.33 32.89,4.29 33.21,4.29 33.84,3.65 33.84,3.33 U$15.P$9
N$129  (via drill 0.38)
  Top 0.152: v33.05,1.91 33.69,2.54 33.69,4.13 U$16.P$7
  Bottom 0.152: v33.05,1.91 33.69,2.54 33.84,2.54 34.32,3.02 34.32,3.18 U$15.P$8
N$130  (via drill 0.38)
  Top 0.152: v33.84,1.91 34.16,2.22 34.16,3.97 34.32,4.13 U$16.P$6
  Bottom 0.152: v33.84,1.91 34.64,2.7 34.64,3.18 U$15.P$7
N$131  (via drill 0.38)
  Top 0.152: v38.92,4.29 38.77,4.13 38.77,2.54 37.97,1.75 34.48,1.75 34.48,3.33 34.96,3.81 34.96,4.13 U$16.P$5
  Bottom 0.152: v38.92,4.29 35.59,4.29 35.12,3.81 35.12,3.33 U$15.P$6
N$132  (via drill 0.38)
  Top 0.152: v35.12,2.38 35.59,2.86 35.59,4.13 U$16.P$4
  Bottom 0.152: v35.12,2.38 35.43,2.7 35.43,3.18 U$15.P$5
N$133  (via drill 0.38)
  Top 0.152: v35.91,2.38 36.23,2.7 36.23,4.13 U$16.P$3
  Bottom 0.152: v35.91,2.38 35.91,3.18 U$15.P$4
N$134  (via drill 0.38)
  Top 0.152: v36.7,2.38 36.86,2.54 36.86,4.13 U$16.P$2
  Bottom 0.152: v36.7,2.38 36.23,2.86 36.23,3.18 U$15.P$3
N$135  (via drill 0.38)
  Top 0.152: v37.81,3.18 37.65,3.33 37.65,4.13 U$16.P$1
  Bottom 0.152: v37.81,3.18 37.81,3.33 37.18,3.97 37.02,3.97 36.7,3.65 36.7,3.33 U$15.P$2
N$136  (via drill 0.38)
  Top 0.152: v37.81,2.38 38.45,3.02 38.45,3.97 38.29,4.13 U$16.P$17
  Bottom 0.152: v37.81,2.38 37.18,3.02 37.18,3.18 U$15.P$1
N$137  (via drill 0.38)
  Top 0.152: v32.42,5.4 33.05,5.4 U$16.P$9
  Bottom 0.152: v32.42,5.4 33.21,5.4 33.84,6.03 33.84,6.35 U$15.P$44
N$138  (via drill 0.38)
  Top 0.152: v33.05,7.62 33.69,6.98 33.69,5.56 U$16.P$10
  Bottom 0.152: v33.05,7.62 33.69,6.98 34,6.98 34.32,6.67 34.32,6.51 U$15.P$43
N$139  (via drill 0.38)
  Top 0.152: v33.84,7.62 34.16,7.3 34.16,5.71 34.32,5.56 U$16.P$11
  Bottom 0.152: v33.84,7.62 34.64,6.83 34.64,6.51 U$15.P$42
N$140  (via drill 0.38)
  Top 0.152: v38.29,5.4 38.45,5.56 38.45,6.51 37.02,7.94 34.48,7.94 34.48,6.98 34.96,6.51 34.96,5.56 U$16.P$12
  Bottom 0.152: v38.29,5.4 35.59,5.4 35.12,5.87 35.12,6.35 U$15.P$41
N$141  (via drill 0.38)
  Top 0.152: v35.12,7.3 35.59,6.83 35.59,5.56 U$16.P$13
  Bottom 0.152: v35.12,7.3 35.43,6.98 35.43,6.51 U$15.P$40
N$142  (via drill 0.38)
  Top 0.152: v35.91,7.3 36.23,6.98 36.23,5.56 U$16.P$14
  Bottom 0.152: v35.91,7.3 35.91,6.51 U$15.P$39
N$143  (via drill 0.38)
  Top 0.152: v36.7,7.3 36.86,7.14 36.86,5.56 U$16.P$15
  Bottom 0.152: v36.7,7.3 36.23,6.83 36.23,6.51 U$15.P$38
N$144  (via drill 0.38)
  Top 0.152: v37.81,6.35 37.65,6.19 37.65,5.56 U$16.P$16
  Bottom 0.152: v37.81,6.35 37.18,5.71 37.02,5.71 36.7,6.03 36.7,6.35 U$15.P$37